# EAGLE board extra IO (EAGLE 9.2.0)
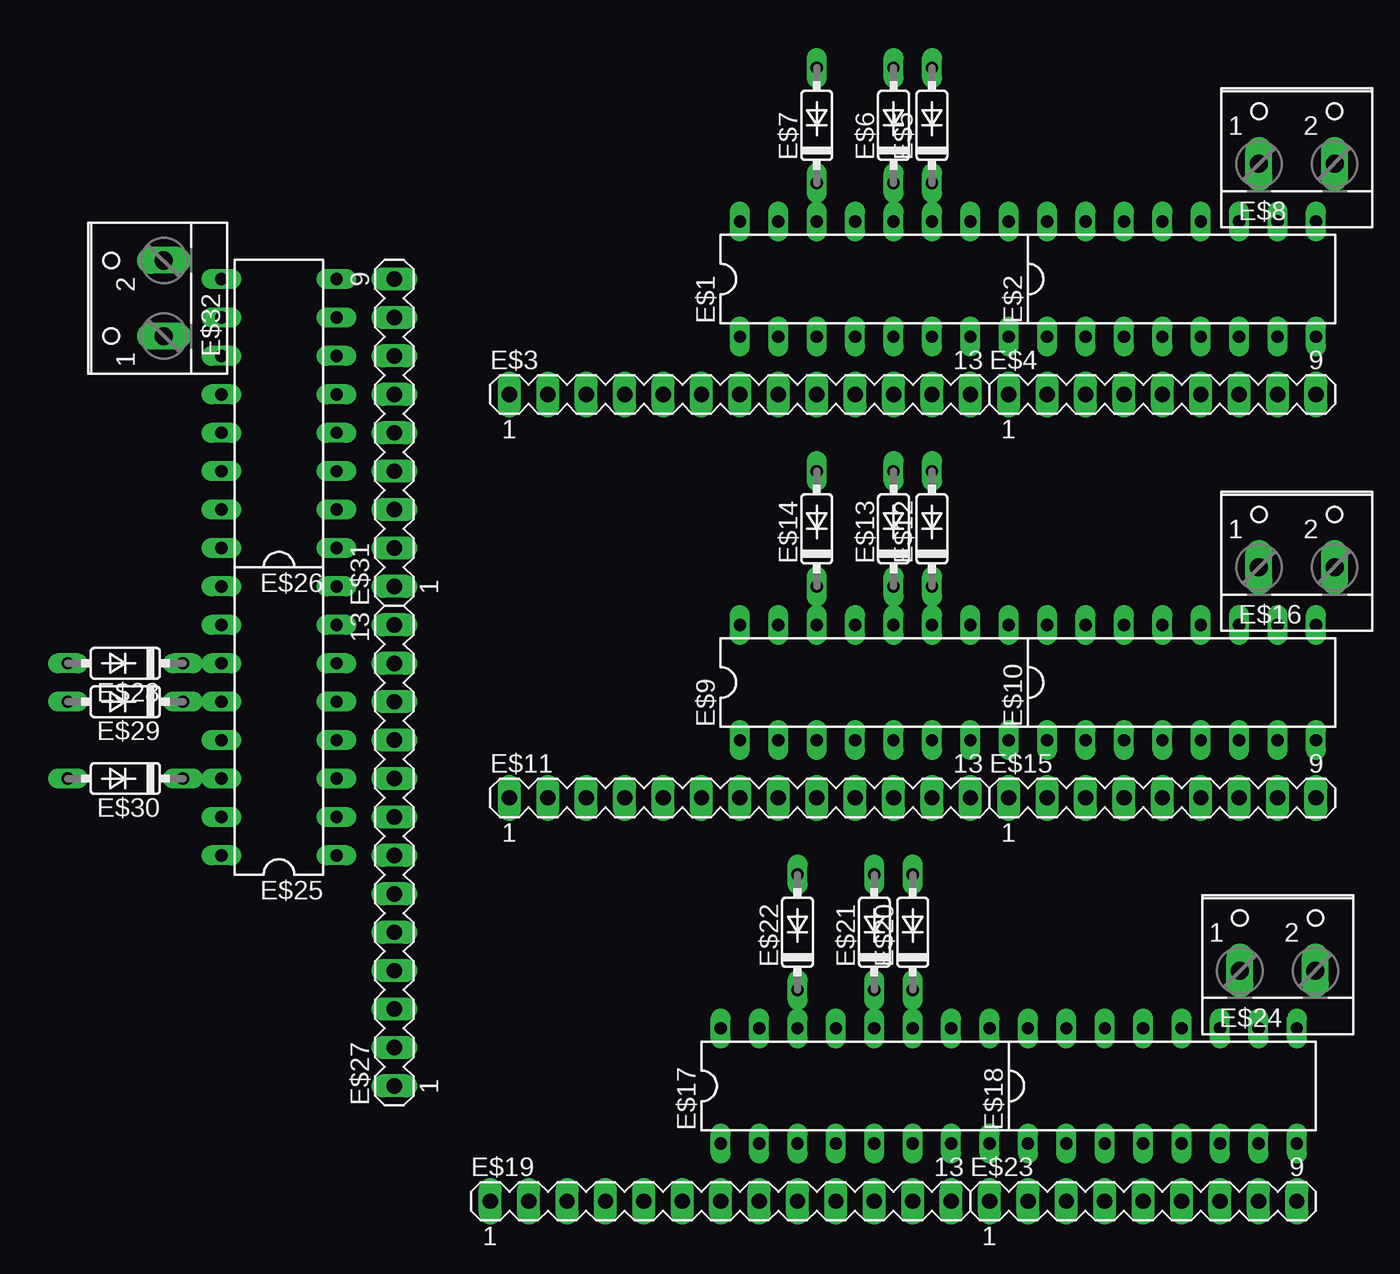
[diagram p0: board, top side]
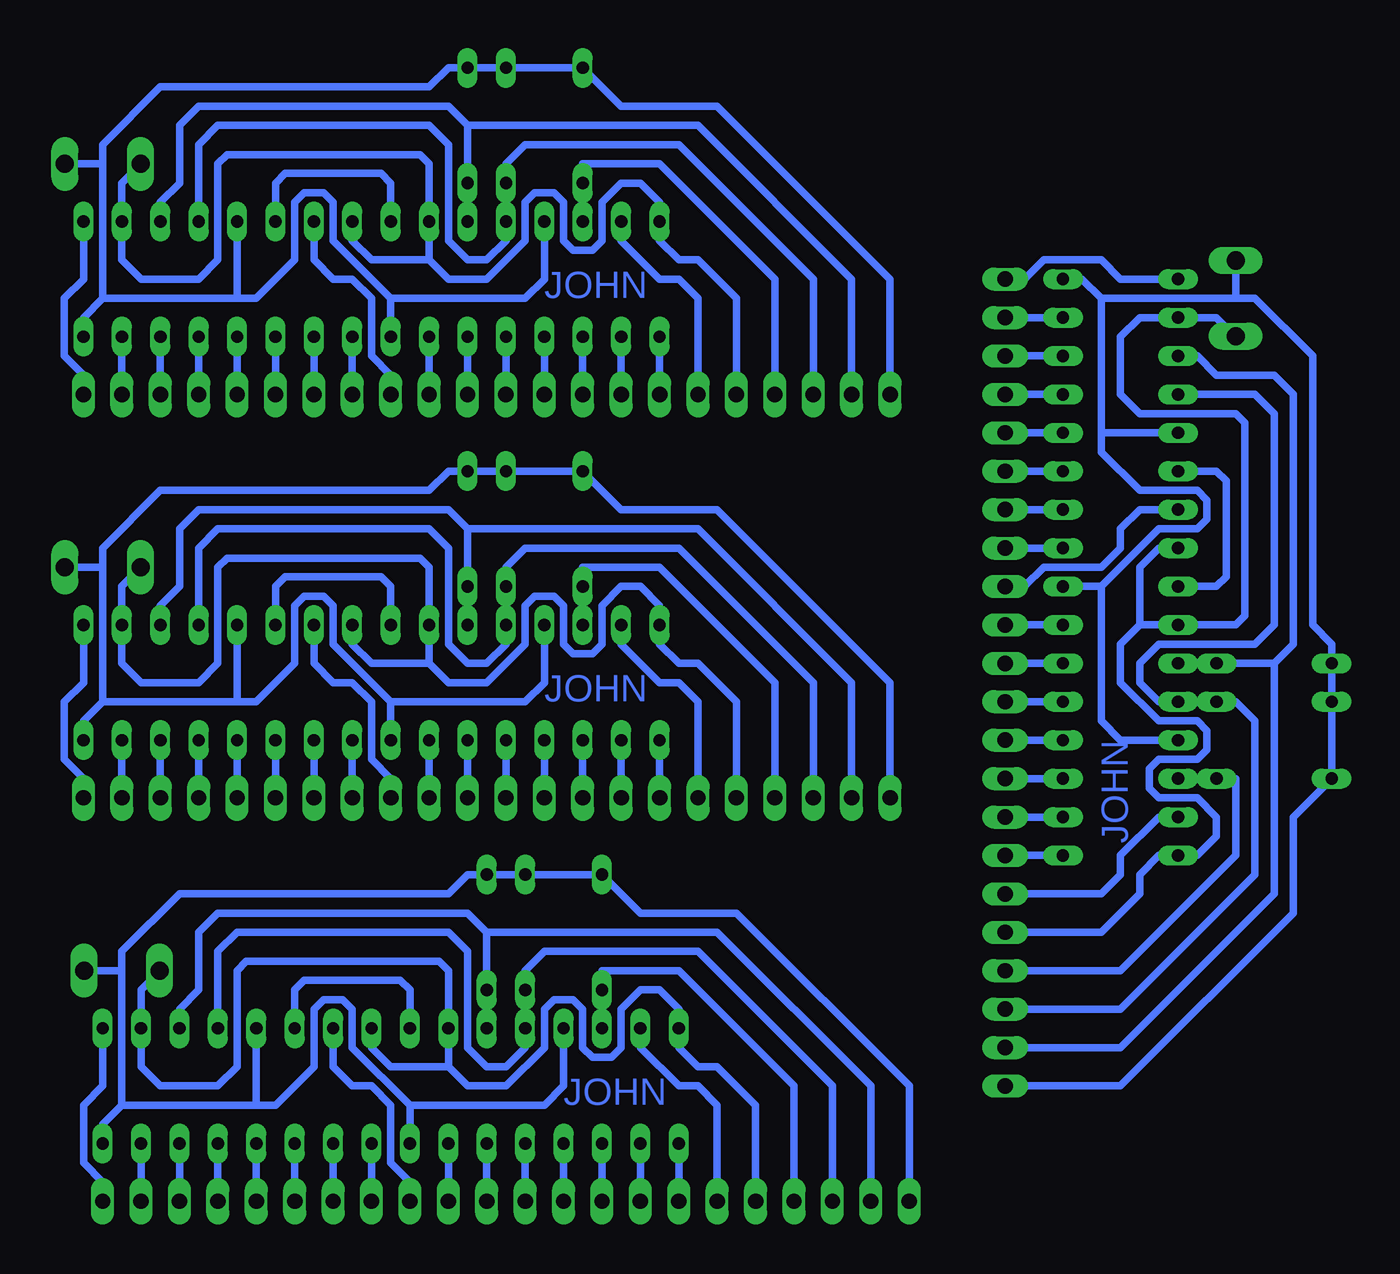
[diagram p1: board, bottom side, seen from below]

No outline drawn. Coordinates in mm, seen from the top.
Copper layers (1*16): Top 0.035mm / dielectric 1.5mm / Bottom 0.035mm
Design rules "default": minimum track width 6mil, minimum drill 0.35mm, track to track 6mil, track to pad 6mil, pad to pad 6mil, via to via 6mil, smd to smd 6mil, copper to edge 40mil, drill to drill 6mil, minimum pad ring 10mil, minimum via ring 8mil, stop-mask expansion 4mil, vias tented up to drill 0mil, thermal gap 10mil

## Footprints (pad centres in the part's own frame; a part is rotated, then mirrored left to right if it is on the bottom)
DIL16 = drill 0.813 long: 1 -8.89,-3.81; 2 -6.35,-3.81; 3 -3.81,-3.81; 4 -1.27,-3.81; 5 1.27,-3.81; 6 3.81,-3.81; 7 6.35,-3.81; 8 8.89,-3.81; 9 8.89,3.81; 10 6.35,3.81; 11 3.81,3.81; 12 1.27,3.81; 13 -1.27,3.81; 14 -3.81,3.81; 15 -6.35,3.81; 16 -8.89,3.81
MA13-1 = drill 1.016 long: 1 -15.24,0; 2 -12.7,0; 3 -10.16,0; 4 -7.62,0; 5 -5.08,0; 6 -2.54,0; 7 0,0; 8 2.54,0; 9 5.08,0; 10 7.62,0; 11 10.16,0; 12 12.7,0; 13 15.24,0
MA09-1 = drill 1.016 long: 1 -10.16,0; 2 -7.62,0; 3 -5.08,0; 4 -2.54,0; 5 0,0; 6 2.54,0; 7 5.08,0; 8 7.62,0; 9 10.16,0
DO35-7 = drill 0.813 long: A 3.81,0; C -3.81,0
W237-102 = drill 1.194 long: 1 -2.5,-1.27; 2 2.5,-1.27

## Placement (x,y rotation side)
E$1  [DIL16]  13.97,31.75 0 top
E$2  [DIL16]  34.29,31.75 0 top
E$3  [MA13-1]  5.08,24.13 0 top
E$4  [MA09-1]  33.02,24.13 0 top
E$5  [DO35-7]  17.78,41.91 90 top
E$6  [DO35-7]  15.24,41.91 90 top
E$7  [DO35-7]  10.16,41.91 90 top
E$8  [W237-102]  41.91,40.64 0 top
E$9  [DIL16]  13.97,5.08 0 top
E$10  [DIL16]  34.29,5.08 0 top
E$11  [MA13-1]  5.08,-2.54 0 top
E$12  [DO35-7]  17.78,15.24 90 top
E$13  [DO35-7]  15.24,15.24 90 top
E$14  [DO35-7]  10.16,15.24 90 top
E$15  [MA09-1]  33.02,-2.54 0 top
E$16  [W237-102]  41.91,13.97 0 top
E$17  [DIL16]  12.7,-21.59 0 top
E$18  [DIL16]  33.02,-21.59 0 top
E$19  [MA13-1]  3.81,-29.21 0 top
E$20  [DO35-7]  16.51,-11.43 90 top
E$21  [DO35-7]  13.97,-11.43 90 top
E$22  [DO35-7]  8.89,-11.43 90 top
E$23  [MA09-1]  31.75,-29.21 0 top
E$24  [W237-102]  40.64,-12.7 0 top
E$25  [DIL16]  -25.4,2.54 90 top
E$26  [DIL16]  -25.4,22.86 90 top
E$27  [MA13-1]  -17.78,-6.35 90 top
E$28  [DO35-7]  -35.56,6.35 180 top
E$29  [DO35-7]  -35.56,3.81 180 top
E$30  [DO35-7]  -35.56,-1.27 180 top
E$31  [MA09-1]  -17.78,21.59 90 top
E$32  [W237-102]  -34.29,30.48 90 top

## Library data of the parts
E$1 E$2 E$9 E$10 E$17 E$18 E$25 E$26 = 74ttl-din
E$3 E$4 E$11 E$15 E$19 E$23 E$27 E$31 = con-lstb
E$5-E$7 E$12-E$14 E$20-E$22 E$28-E$30 = adafruit
E$8 E$16 E$24 E$32 = con-wago-500

## Nets
S$1: E$1.7 E$3.13
S$2: E$1.6 E$3.12
S$3: E$1.5 E$3.11
S$4: E$1.4 E$3.10
S$5: E$1.3 E$3.9
S$6: E$1.2 E$3.8
S$7: E$1.1 E$3.7
S$8: E$1.15 E$3.6
S$9: E$2.15 E$4.1
S$10: E$2.1 E$4.2
S$11: E$2.2 E$4.3
S$12: E$2.3 E$4.4
S$13: E$2.4 E$4.5
S$14: E$2.5 E$4.6
S$15: E$2.6 E$4.7
S$16: E$2.7 E$4.8
S$17: E$1.9 E$2.14
S$18: E$1.10 E$1.16 E$2.10 E$2.16 E$3.5 E$8.1
S$19: E$1.8 E$1.13 E$2.8 E$2.13 E$3.1 E$5.A E$6.A E$7.A E$8.2
S$20: E$9.7 E$11.13
S$21: E$2.9 E$4.9
S$22: E$1.11 E$2.11 E$3.2 E$5.C
S$23: E$1.12 E$2.12 E$3.3 E$6.C
S$24: E$1.14 E$3.4 E$7.C
S$25: E$9.6 E$11.12
S$26: E$9.5 E$11.11
S$27: E$9.4 E$11.10
S$28: E$9.3 E$11.9
S$29: E$9.2 E$11.8
S$30: E$9.1 E$11.7
S$31: E$9.15 E$11.6
S$32: E$9.9 E$10.14
S$33: E$10.15 E$15.1
S$34: E$9.10 E$9.16 E$10.10 E$10.16 E$11.5 E$16.1
S$35: E$9.8 E$9.13 E$10.8 E$10.13 E$11.1 E$12.A E$13.A E$14.A E$16.2
S$36: E$9.11 E$10.11 E$11.2 E$12.C
S$37: E$9.12 E$10.12 E$11.3 E$13.C
S$38: E$9.14 E$11.4 E$14.C
S$39: E$10.1 E$15.2
S$40: E$10.2 E$15.3
S$41: E$10.3 E$15.4
S$42: E$10.4 E$15.5
S$43: E$10.5 E$15.6
S$44: E$10.6 E$15.7
S$45: E$10.7 E$15.8
S$46: E$10.9 E$15.9
S$47: E$17.7 E$19.13
S$48: E$17.6 E$19.12
S$49: E$17.5 E$19.11
S$50: E$17.4 E$19.10
S$51: E$17.3 E$19.9
S$52: E$17.2 E$19.8
S$53: E$17.1 E$19.7
S$54: E$17.15 E$19.6
S$55: E$17.9 E$18.14
S$56: E$18.15 E$23.1
S$57: E$17.10 E$17.16 E$18.10 E$18.16 E$19.5 E$24.1
S$58: E$17.8 E$17.13 E$18.8 E$18.13 E$19.1 E$20.A E$21.A E$22.A E$24.2
S$59: E$17.11 E$18.11 E$19.2 E$20.C
S$60: E$17.12 E$18.12 E$19.3 E$21.C
S$61: E$17.14 E$19.4 E$22.C
S$62: E$18.1 E$23.2
S$63: E$18.2 E$23.3
S$64: E$18.3 E$23.4
S$65: E$18.4 E$23.5
S$66: E$18.5 E$23.6
S$67: E$18.6 E$23.7
S$68: E$18.7 E$23.8
S$69: E$18.9 E$23.9
S$70: E$25.7 E$27.13
S$71: E$25.6 E$27.12
S$72: E$25.5 E$27.11
S$73: E$25.4 E$27.10
S$74: E$25.3 E$27.9
S$75: E$25.2 E$27.8
S$76: E$25.1 E$27.7
S$77: E$25.15 E$27.6
S$78: E$25.9 E$26.14
S$79: E$26.15 E$31.1
S$80: E$25.10 E$25.16 E$26.10 E$26.16 E$27.5 E$32.1
S$81: E$25.8 E$25.13 E$26.8 E$26.13 E$27.1 E$28.A E$29.A E$30.A E$32.2
S$82: E$25.11 E$26.11 E$27.2 E$28.C
S$83: E$25.12 E$26.12 E$27.3 E$29.C
S$84: E$25.14 E$27.4 E$30.C
S$85: E$26.1 E$31.2
S$86: E$26.2 E$31.3
S$87: E$26.3 E$31.4
S$88: E$26.4 E$31.5
S$89: E$26.5 E$31.6
S$90: E$26.6 E$31.7
S$91: E$26.7 E$31.8
S$92: E$26.9 E$31.9

## Tracks (layer width: path | path; a pad name or v marks a point on that pad's centre or on a via)
S$1
  Bottom 0.508: E$1.7 E$3.13
S$2
  Bottom 0.508: E$1.6 E$3.12
S$3
  Bottom 0.508: E$1.5 E$3.11
S$4
  Bottom 0.508: E$1.4 E$3.10
S$5
  Bottom 0.508: E$1.3 E$3.9
S$6
  Bottom 0.508: E$1.2 E$3.8
S$7
  Bottom 0.508: E$1.1 E$3.7
S$8
  Bottom 0.508: E$1.15 7.62,34.29 5.08,31.75 3.81,31.75 2.54,30.48 E$3.6
S$9
  Bottom 0.508: E$2.15 27.94,33.02 26.67,31.75 25.4,31.75 24.13,30.48 24.13,26.67 22.86,25.4 E$4.1
S$10
  Bottom 0.508: E$2.1 E$4.2
S$11
  Bottom 0.508: E$2.2 E$4.3
S$12
  Bottom 0.508: E$2.3 E$4.4
S$13
  Bottom 0.508: E$2.4 E$4.5
S$14
  Bottom 0.508: E$2.5 E$4.6
S$15
  Bottom 0.508: E$2.6 E$4.7
S$16
  Bottom 0.508: E$2.7 E$4.8
S$17
  Bottom 0.508: E$2.14 30.48,38.1 29.84,38.73 23.5,38.73 22.86,38.1 E$1.9
S$18
  Bottom 0.508: E$2.16 25.4,34.29 24.13,33.02 20.32,33.02 | 20.32,33.02 E$1.10 20.32,39.37 20.93,39.98 33.68,39.98 34.29,39.37 34.29,33.02 35.56,31.75 39.37,31.75 40.64,33.02 E$2.10 40.64,38.1 39.41,39.33 E$8.1 | E$3.5 0,30.48 2.54,33.02 3.81,33.02 5.08,34.29 E$1.16 5.08,36.83 6.35,38.1 7.62,38.1 8.89,36.83 8.89,34.29 9.53,33.66 10.79,33.66 11.43,34.29 11.43,36.83 12.06,37.47 13.34,37.47 13.97,36.83 13.97,34.29 16.51,31.75 19.05,31.75 20.32,33.02
S$19
  Bottom 0.508: E$1.13 12.7,31.75 13.97,30.48 22.86,30.48 | 22.86,30.48 E$1.8 | 41.91,30.48 43.18,29.21 E$2.8 | 22.86,30.48 26.67,34.29 26.67,36.83 27.3,37.47 28.57,37.47 29.21,36.83 29.21,33.02 31.75,30.48 33.02,30.48 | 33.02,30.48 41.91,30.48 | E$2.13 33.02,30.48 | 41.91,30.48 41.91,39.37 | 41.91,39.37 41.91,40.64 38.1,44.45 20.32,44.45 19.05,45.72 E$5.A E$6.A E$7.A 7.62,43.18 1.27,43.18 -10.16,31.75 E$3.1 | E$8.2 41.91,39.37
S$20
  Bottom 0.508: E$9.7 E$11.13
S$21
  Bottom 0.508: E$4.9 43.18,25.4 44.45,26.67 44.45,30.48 43.18,31.75 E$2.9
S$22
  Bottom 0.508: E$1.11 E$5.C 17.78,41.91 | 17.78,41.91 2.54,41.91 -7.62,31.75 E$3.2 | 17.78,41.91 19.05,43.18 35.56,43.18 36.83,41.91 36.83,38.1 38.1,36.83 E$2.11
S$23
  Bottom 0.508: E$3.3 -5.08,31.75 3.81,40.64 13.97,40.64 15.24,39.37 E$6.C E$1.12 15.24,34.29 16.51,33.02 17.78,33.02 19.05,34.29 19.05,40.64 20.32,41.91 34.29,41.91 35.56,40.64 E$2.12
S$24
  Bottom 0.508: E$1.14 E$7.C 10.16,39.37 5.08,39.37 -2.54,31.75 E$3.4
S$25
  Bottom 0.508: E$9.6 E$11.12
S$26
  Bottom 0.508: E$9.5 E$11.11
S$27
  Bottom 0.508: E$9.4 E$11.10
S$28
  Bottom 0.508: E$9.3 E$11.9
S$29
  Bottom 0.508: E$9.2 E$11.8
S$30
  Bottom 0.508: E$9.1 E$11.7
S$31
  Bottom 0.508: E$9.15 7.62,7.62 5.08,5.08 3.81,5.08 2.54,3.81 E$11.6
S$32
  Bottom 0.508: E$10.14 30.48,11.43 29.84,12.06 23.5,12.06 22.86,11.43 E$9.9
S$33
  Bottom 0.508: E$10.15 27.94,6.35 26.67,5.08 25.4,5.08 24.13,3.81 24.13,0 22.86,-1.27 E$15.1
S$34
  Bottom 0.508: E$10.16 25.4,7.62 24.13,6.35 20.32,6.35 | 20.32,6.35 E$9.10 20.32,12.7 20.93,13.31 33.68,13.31 34.29,12.7 34.29,6.35 35.56,5.08 39.37,5.08 40.64,6.35 E$10.10 40.64,11.43 39.41,12.66 E$16.1 | E$11.5 0,3.81 2.54,6.35 3.81,6.35 5.08,7.62 E$9.16 5.08,10.16 6.35,11.43 7.62,11.43 8.89,10.16 8.89,7.62 9.53,6.99 10.79,6.99 11.43,7.62 11.43,10.16 12.06,10.79 13.34,10.79 13.97,10.16 13.97,7.62 16.51,5.08 19.05,5.08 20.32,6.35
S$35
  Bottom 0.508: E$9.13 12.7,5.08 13.97,3.81 22.86,3.81 | 22.86,3.81 E$9.8 | 41.91,3.81 43.18,2.54 E$10.8 | 22.86,3.81 26.67,7.62 26.67,10.16 27.3,10.79 28.57,10.79 29.21,10.16 29.21,6.35 31.75,3.81 33.02,3.81 | 33.02,3.81 41.91,3.81 | E$10.13 33.02,3.81 | 41.91,3.81 41.91,12.7 | 41.91,12.7 41.91,13.97 38.1,17.78 20.32,17.78 19.05,19.05 E$12.A E$13.A E$14.A 7.62,16.51 1.27,16.51 -10.16,5.08 E$11.1 | E$16.2 41.91,12.7
S$36
  Bottom 0.508: E$9.11 E$12.C 17.78,15.24 | 17.78,15.24 2.54,15.24 -7.62,5.08 E$11.2 | 17.78,15.24 19.05,16.51 35.56,16.51 36.83,15.24 36.83,11.43 38.1,10.16 E$10.11
S$37
  Bottom 0.508: E$11.3 -5.08,5.08 3.81,13.97 13.97,13.97 15.24,12.7 E$13.C E$9.12 15.24,7.62 16.51,6.35 17.78,6.35 19.05,7.62 19.05,13.97 20.32,15.24 34.29,15.24 35.56,13.97 E$10.12
S$38
  Bottom 0.508: E$9.14 E$14.C 10.16,12.7 5.08,12.7 -2.54,5.08 E$11.4
S$39
  Bottom 0.508: E$10.1 E$15.2
S$40
  Bottom 0.508: E$10.2 E$15.3
S$41
  Bottom 0.508: E$10.3 E$15.4
S$42
  Bottom 0.508: E$10.4 E$15.5
S$43
  Bottom 0.508: E$10.5 E$15.6
S$44
  Bottom 0.508: E$10.6 E$15.7
S$45
  Bottom 0.508: E$10.7 E$15.8
S$46
  Bottom 0.508: E$15.9 43.18,-1.27 44.45,0 44.45,3.81 43.18,5.08 E$10.9
S$47
  Bottom 0.508: E$17.7 E$19.13
S$48
  Bottom 0.508: E$17.6 E$19.12
S$49
  Bottom 0.508: E$17.5 E$19.11
S$50
  Bottom 0.508: E$17.4 E$19.10
S$51
  Bottom 0.508: E$17.3 E$19.9
S$52
  Bottom 0.508: E$17.2 E$19.8
S$53
  Bottom 0.508: E$17.1 E$19.7
S$54
  Bottom 0.508: E$17.15 6.35,-19.05 3.81,-21.59 2.54,-21.59 1.27,-22.86 E$19.6
S$55
  Bottom 0.508: E$18.14 29.21,-15.24 28.57,-14.61 22.23,-14.61 21.59,-15.24 E$17.9
S$56
  Bottom 0.508: E$18.15 26.67,-20.32 25.4,-21.59 24.13,-21.59 22.86,-22.86 22.86,-26.67 21.59,-27.94 E$23.1
S$57
  Bottom 0.508: E$18.16 24.13,-19.05 22.86,-20.32 19.05,-20.32 | 19.05,-20.32 E$17.10 19.05,-13.97 19.66,-13.36 32.41,-13.36 33.02,-13.97 33.02,-20.32 34.29,-21.59 38.1,-21.59 39.37,-20.32 E$18.10 39.37,-15.24 38.14,-14.01 E$24.1 | E$19.5 -1.27,-22.86 1.27,-20.32 2.54,-20.32 3.81,-19.05 E$17.16 3.81,-16.51 5.08,-15.24 6.35,-15.24 7.62,-16.51 7.62,-19.05 8.26,-19.68 9.53,-19.68 10.16,-19.05 10.16,-16.51 10.79,-15.88 12.06,-15.88 12.7,-16.51 12.7,-19.05 15.24,-21.59 17.78,-21.59 19.05,-20.32
S$58
  Bottom 0.508: E$17.13 11.43,-21.59 12.7,-22.86 21.59,-22.86 | 21.59,-22.86 E$17.8 | 40.64,-22.86 41.91,-24.13 E$18.8 | 21.59,-22.86 25.4,-19.05 25.4,-16.51 26.04,-15.88 27.3,-15.88 27.94,-16.51 27.94,-20.32 30.48,-22.86 31.75,-22.86 | 31.75,-22.86 40.64,-22.86 | E$18.13 31.75,-22.86 | 40.64,-22.86 40.64,-13.97 | 40.64,-13.97 40.64,-12.7 36.83,-8.89 19.05,-8.89 17.78,-7.62 E$20.A E$21.A E$22.A 6.35,-10.16 0,-10.16 -11.43,-21.59 E$19.1 | E$24.2 40.64,-13.97
S$59
  Bottom 0.508: E$17.11 E$20.C 16.51,-11.43 | 16.51,-11.43 1.27,-11.43 -8.89,-21.59 E$19.2 | 16.51,-11.43 17.78,-10.16 34.29,-10.16 35.56,-11.43 35.56,-15.24 36.83,-16.51 E$18.11
S$60
  Bottom 0.508: E$19.3 -6.35,-21.59 2.54,-12.7 12.7,-12.7 13.97,-13.97 E$21.C E$17.12 13.97,-19.05 15.24,-20.32 16.51,-20.32 17.78,-19.05 17.78,-12.7 19.05,-11.43 33.02,-11.43 34.29,-12.7 E$18.12
S$61
  Bottom 0.508: E$17.14 E$22.C 8.89,-13.97 3.81,-13.97 -3.81,-21.59 E$19.4
S$62
  Bottom 0.508: E$18.1 E$23.2
S$63
  Bottom 0.508: E$18.2 E$23.3
S$64
  Bottom 0.508: E$18.3 E$23.4
S$65
  Bottom 0.508: E$18.4 E$23.5
S$66
  Bottom 0.508: E$18.5 E$23.6
S$67
  Bottom 0.508: E$18.6 E$23.7
S$68
  Bottom 0.508: E$18.7 E$23.8
S$69
  Bottom 0.508: E$23.9 41.91,-27.94 43.18,-26.67 43.18,-22.86 41.91,-21.59 E$18.9
S$70
  Bottom 0.508: E$25.7 E$27.13
S$71
  Bottom 0.508: E$25.6 E$27.12
S$72
  Bottom 0.508: E$25.5 E$27.11
S$73
  Bottom 0.508: E$25.4 E$27.10
S$74
  Bottom 0.508: E$25.3 E$27.9
S$75
  Bottom 0.508: E$25.2 E$27.8
S$76
  Bottom 0.508: E$25.1 E$27.7
S$77
  Bottom 0.508: E$25.15 -27.94,-3.81 -25.4,-6.35 -25.4,-7.62 -24.13,-8.89 E$27.6
S$78
  Bottom 0.508: E$26.14 -31.75,19.05 -32.38,18.41 -32.38,12.06 -31.75,11.43 E$25.9
S$79
  Bottom 0.508: E$26.15 -26.67,16.51 -25.4,15.24 -25.4,13.97 -24.13,12.7 -20.32,12.7 -19.05,11.43 E$31.1
S$80
  Bottom 0.508: E$26.16 -27.94,13.97 -26.67,12.7 -26.67,8.89 | -26.67,8.89 E$25.10 -33.02,8.89 -33.63,9.5 -33.63,22.25 -33.02,22.86 -26.67,22.86 -25.4,24.13 -25.4,27.94 -26.67,29.21 E$26.10 -31.75,29.21 -32.98,27.98 E$32.1 | E$27.5 -24.13,-11.43 -26.67,-8.89 -26.67,-7.62 -27.94,-6.35 E$25.16 -30.48,-6.35 -31.75,-5.08 -31.75,-3.81 -30.48,-2.54 -27.94,-2.54 -27.3,-1.91 -27.3,-0.64 -27.94,0 -30.48,0 -31.11,0.64 -31.11,1.91 -30.48,2.54 -27.94,2.54 -25.4,5.08 -25.4,7.62 -26.67,8.89
S$81
  Bottom 0.508: E$25.13 -25.4,1.27 -24.13,2.54 -24.13,11.43 | -24.13,11.43 E$25.8 | -24.13,30.48 -22.86,31.75 E$26.8 | -24.13,11.43 -27.94,15.24 -30.48,15.24 -31.11,15.88 -31.11,17.14 -30.48,17.78 -26.67,17.78 -24.13,20.32 -24.13,21.59 | -24.13,21.59 -24.13,30.48 | E$26.13 -24.13,21.59 | -24.13,30.48 -33.02,30.48 | -33.02,30.48 -34.29,30.48 -38.1,26.67 -38.1,8.89 -39.37,7.62 E$28.A E$29.A E$30.A -36.83,-3.81 -36.83,-10.16 -25.4,-21.59 E$27.1 | E$32.2 -33.02,30.48
S$82
  Bottom 0.508: E$25.11 E$28.C -35.56,6.35 | -35.56,6.35 -35.56,-8.89 -25.4,-19.05 E$27.2 | -35.56,6.35 -36.83,7.62 -36.83,24.13 -35.56,25.4 -31.75,25.4 -30.48,26.67 E$26.11
S$83
  Bottom 0.508: E$27.3 -25.4,-16.51 -34.29,-7.62 -34.29,2.54 -33.02,3.81 E$29.C E$25.12 -27.94,3.81 -26.67,5.08 -26.67,6.35 -27.94,7.62 -34.29,7.62 -35.56,8.89 -35.56,22.86 -34.29,24.13 E$26.12
S$84
  Bottom 0.508: E$25.14 E$30.C -33.02,-1.27 -33.02,-6.35 -25.4,-13.97 E$27.4
S$85
  Bottom 0.508: E$26.1 E$31.2
S$86
  Bottom 0.508: E$26.2 E$31.3
S$87
  Bottom 0.508: E$26.3 E$31.4
S$88
  Bottom 0.508: E$26.4 E$31.5
S$89
  Bottom 0.508: E$26.5 E$31.6
S$90
  Bottom 0.508: E$26.6 E$31.7
S$91
  Bottom 0.508: E$26.7 E$31.8
S$92
  Bottom 0.508: E$31.9 -19.05,31.75 -20.32,33.02 -24.13,33.02 -25.4,31.75 E$26.9

## Text on the board
Bottom: JOHN | JOHN | JOHN | JOHN